# Altium PCB UnoShield.PcbDoc
Units mm, origin at the board's own origin, x right, y up, seen from the top; angles counter-clockwise.
Board outline 68.58 x 53.34 mm, 4 copper layers (Top Layer, Signal Layer 1, Signal Layer 2, Bottom Layer), stack 0.778 mm thick; 52 components, 29 nets, 160 pads, 29 vias.
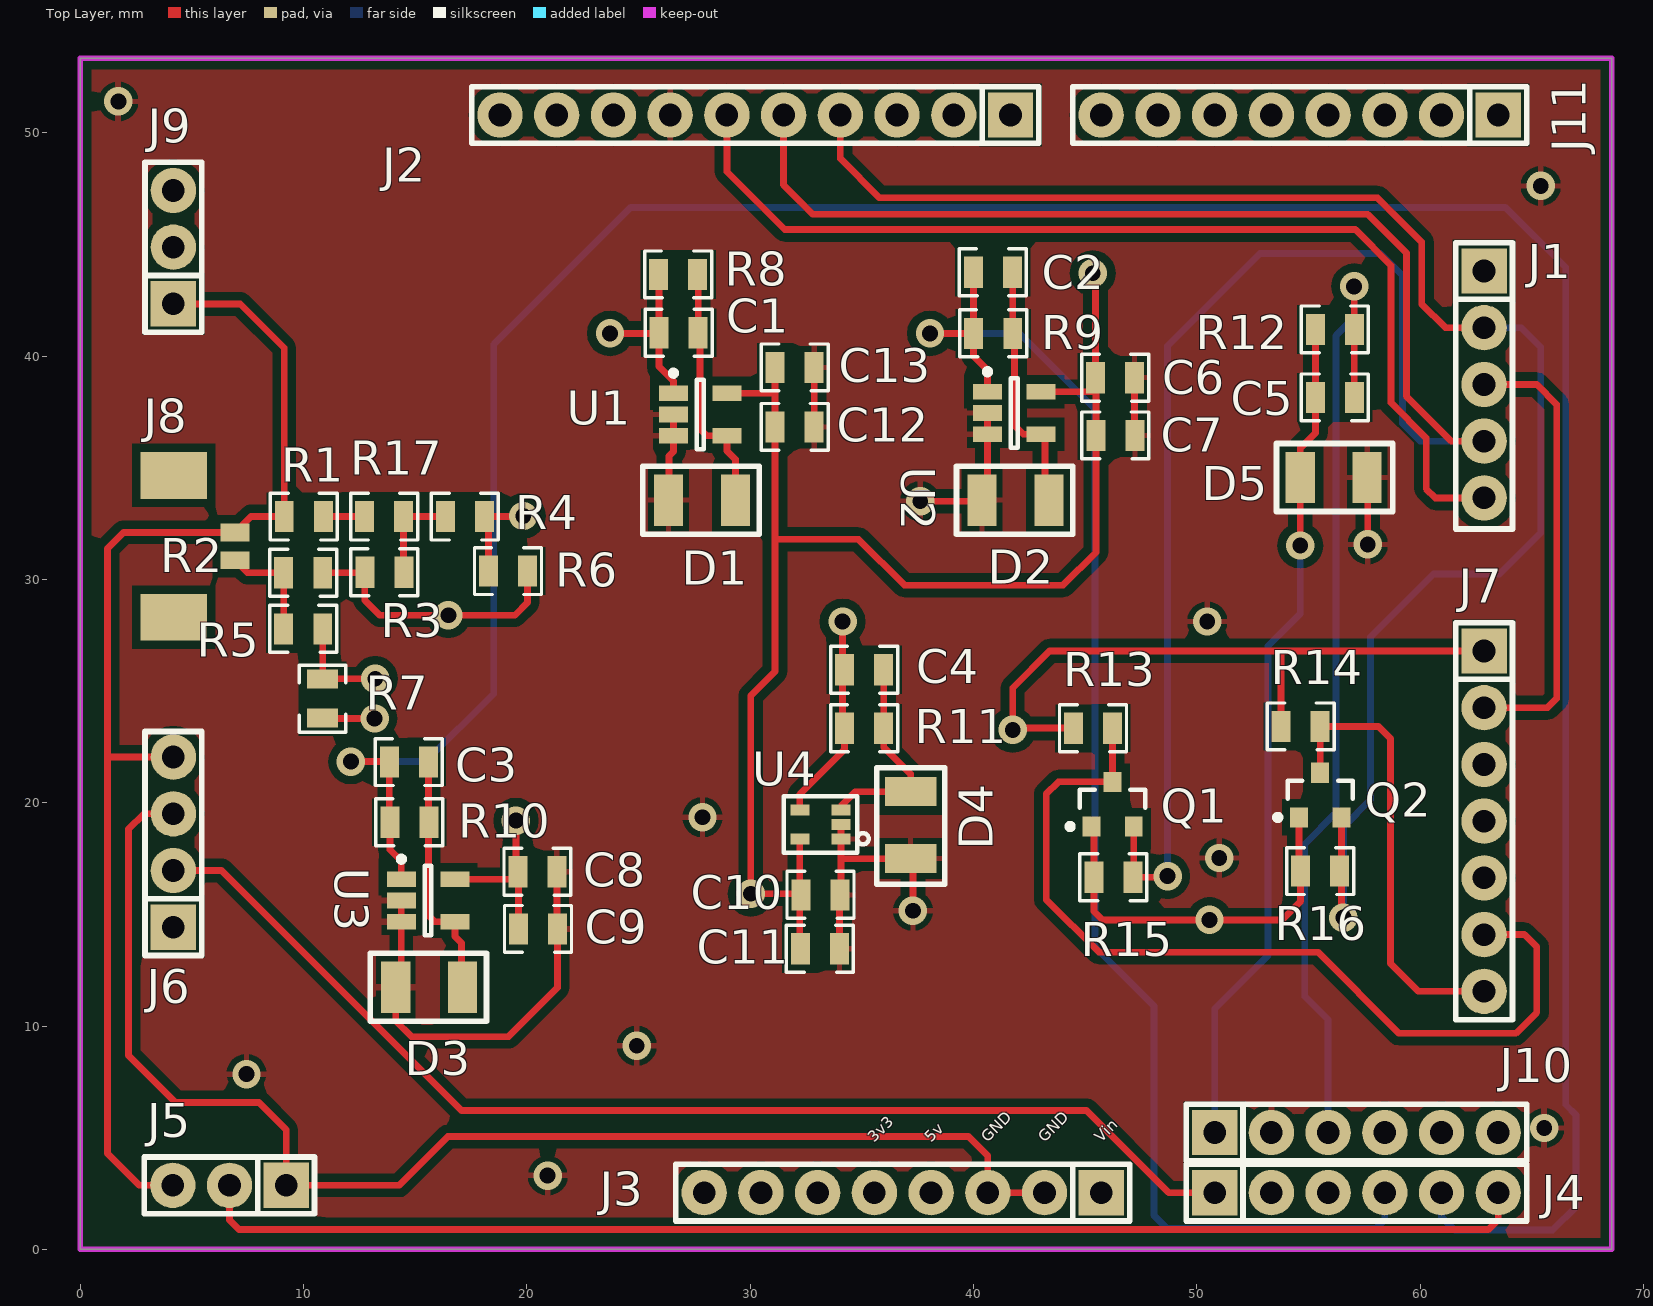
[diagram p0: Top Layer view]
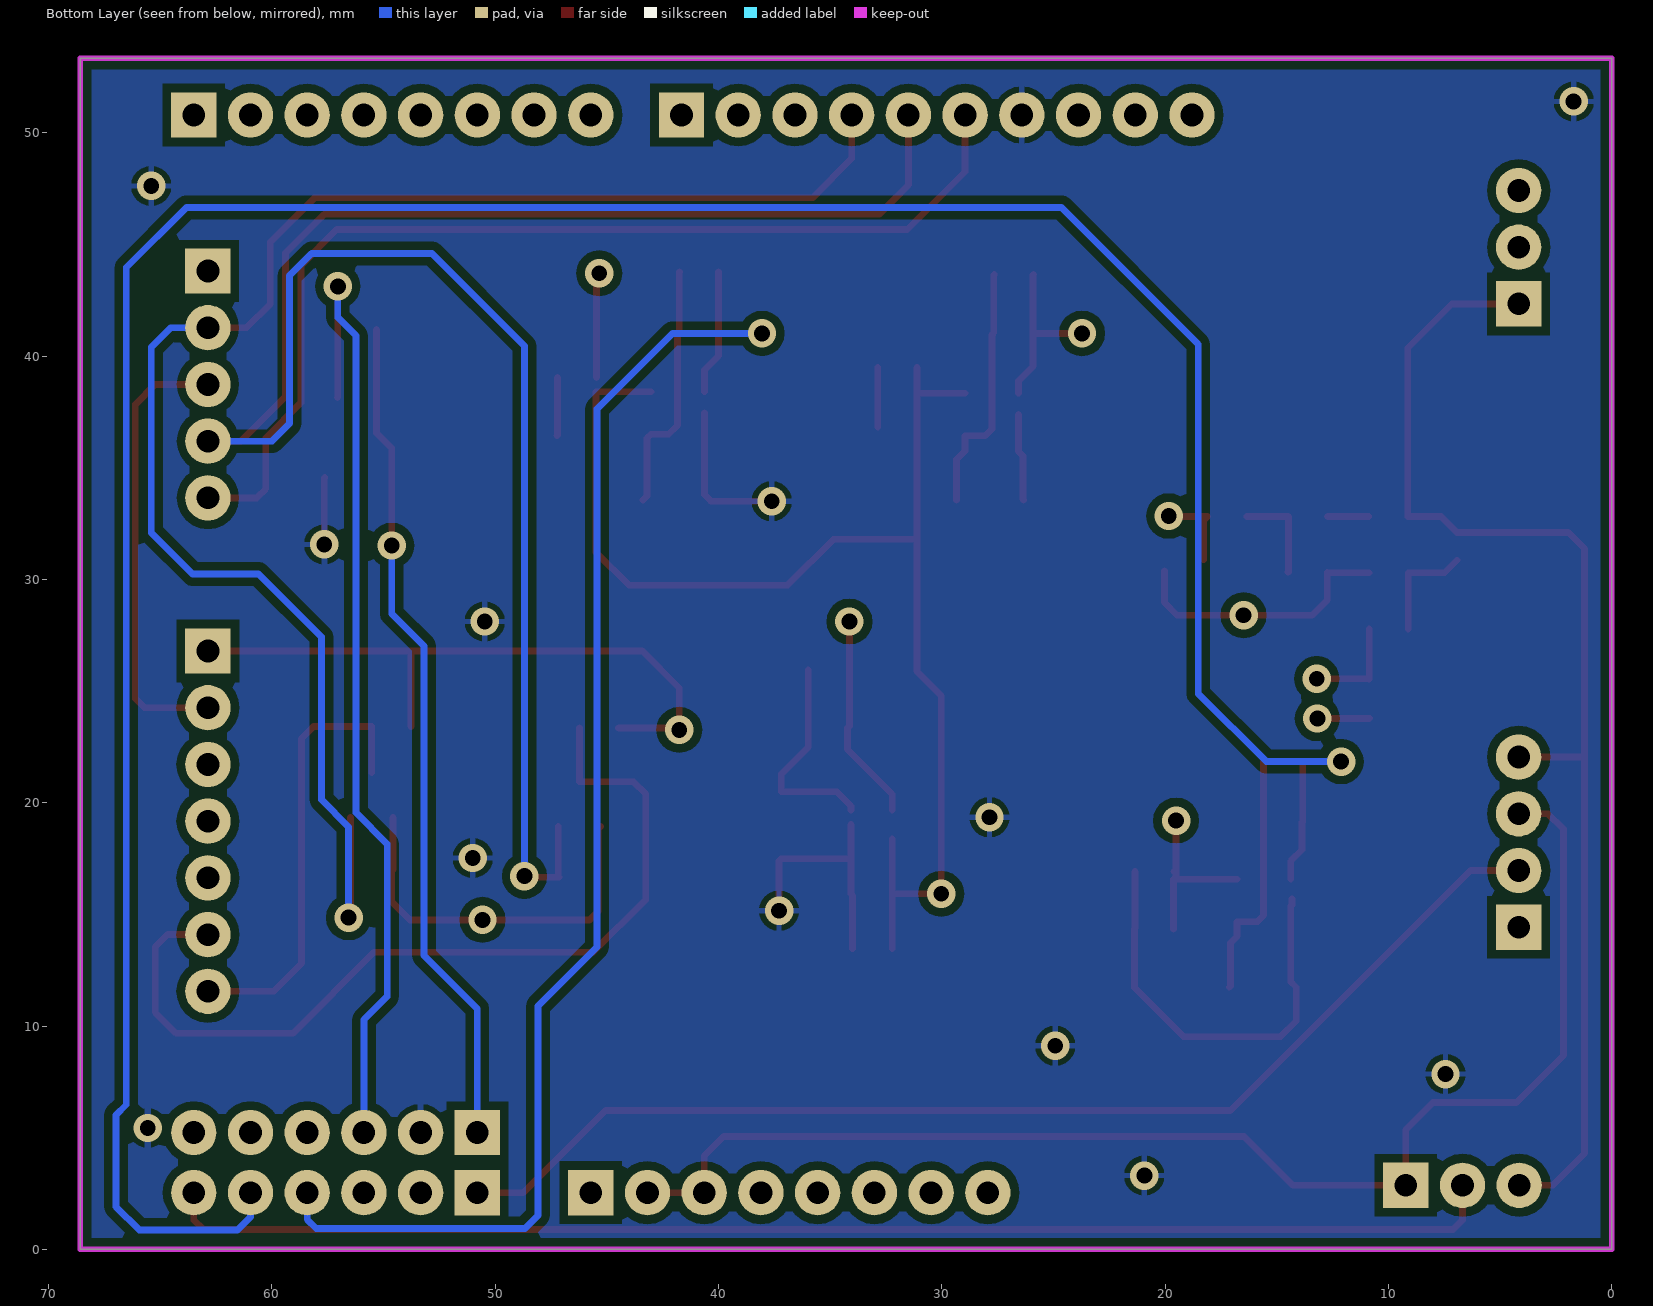
[diagram p1: Bottom Layer view, seen from below]
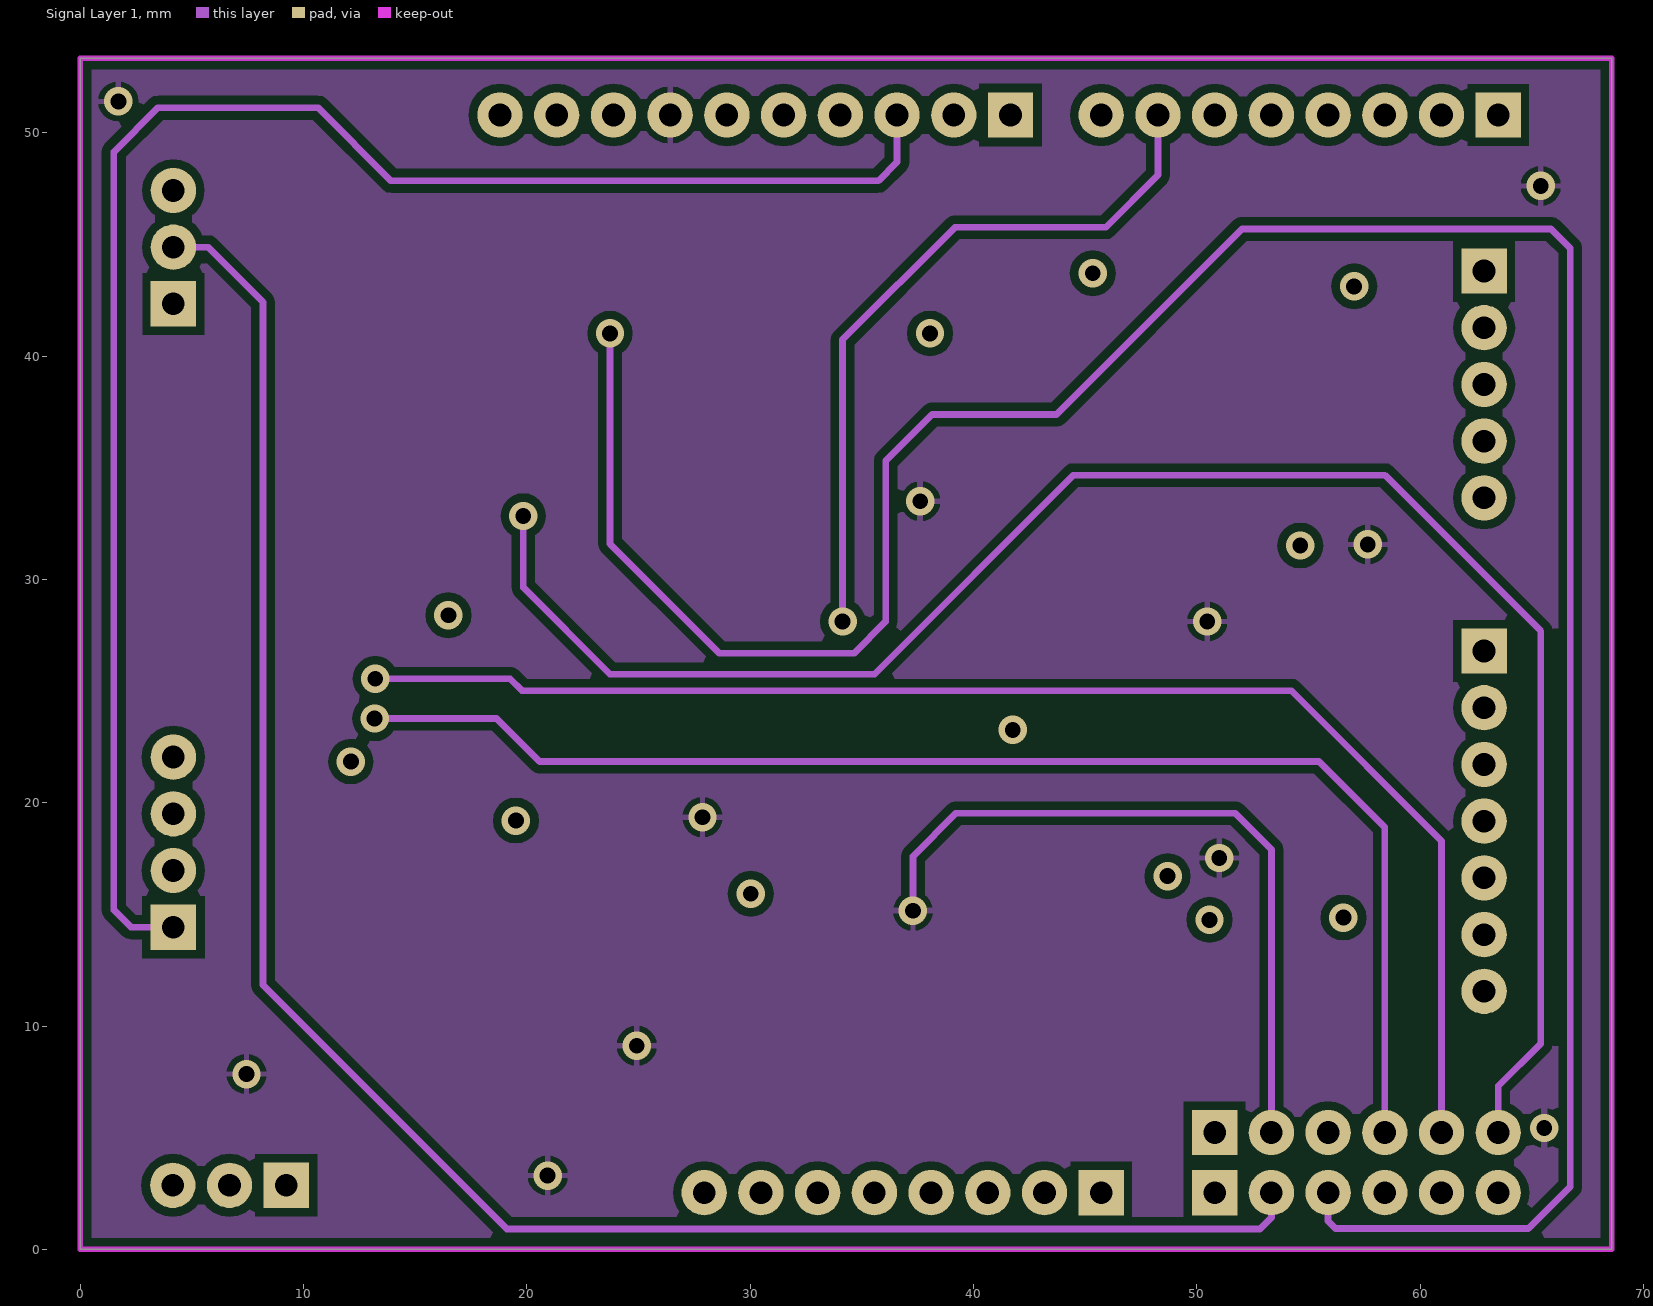
[diagram p2: Signal Layer 1]
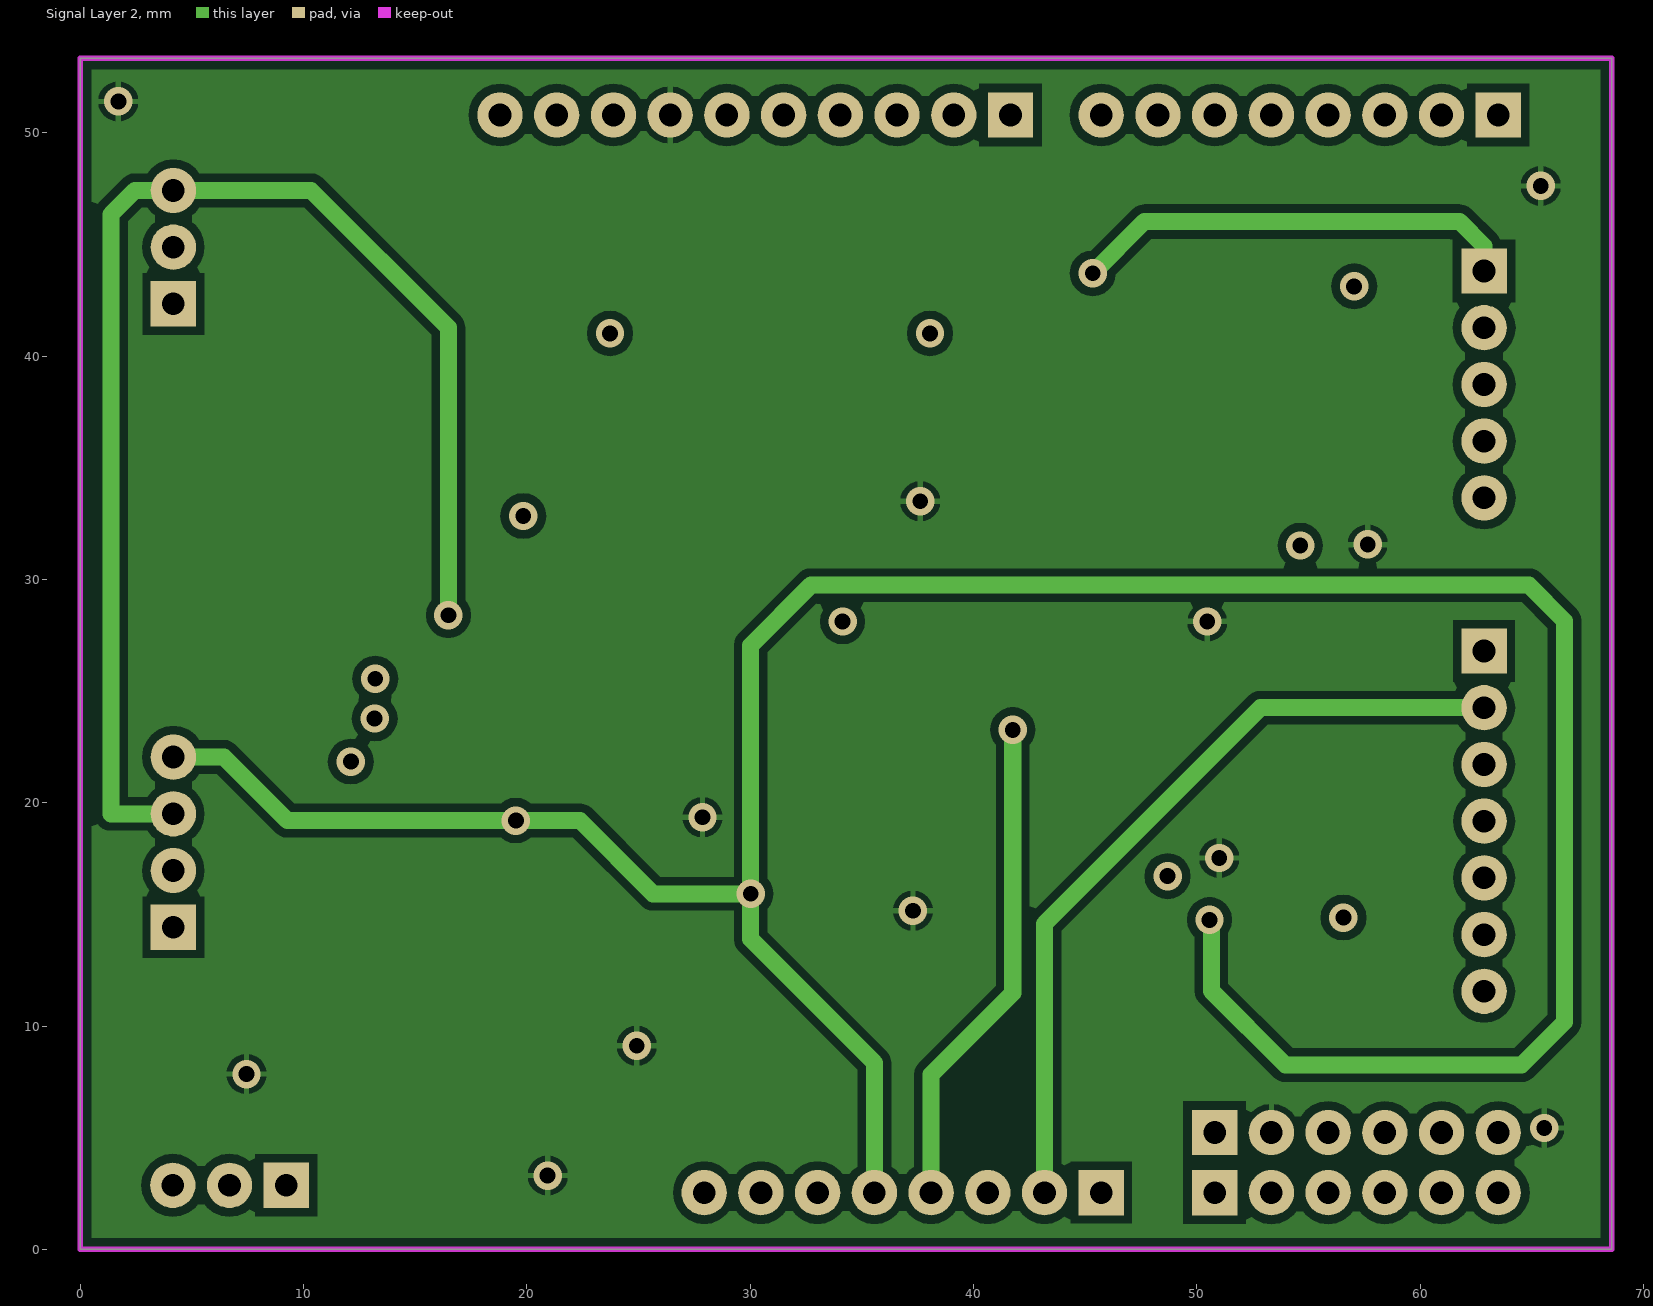
[diagram p3: Signal Layer 2]
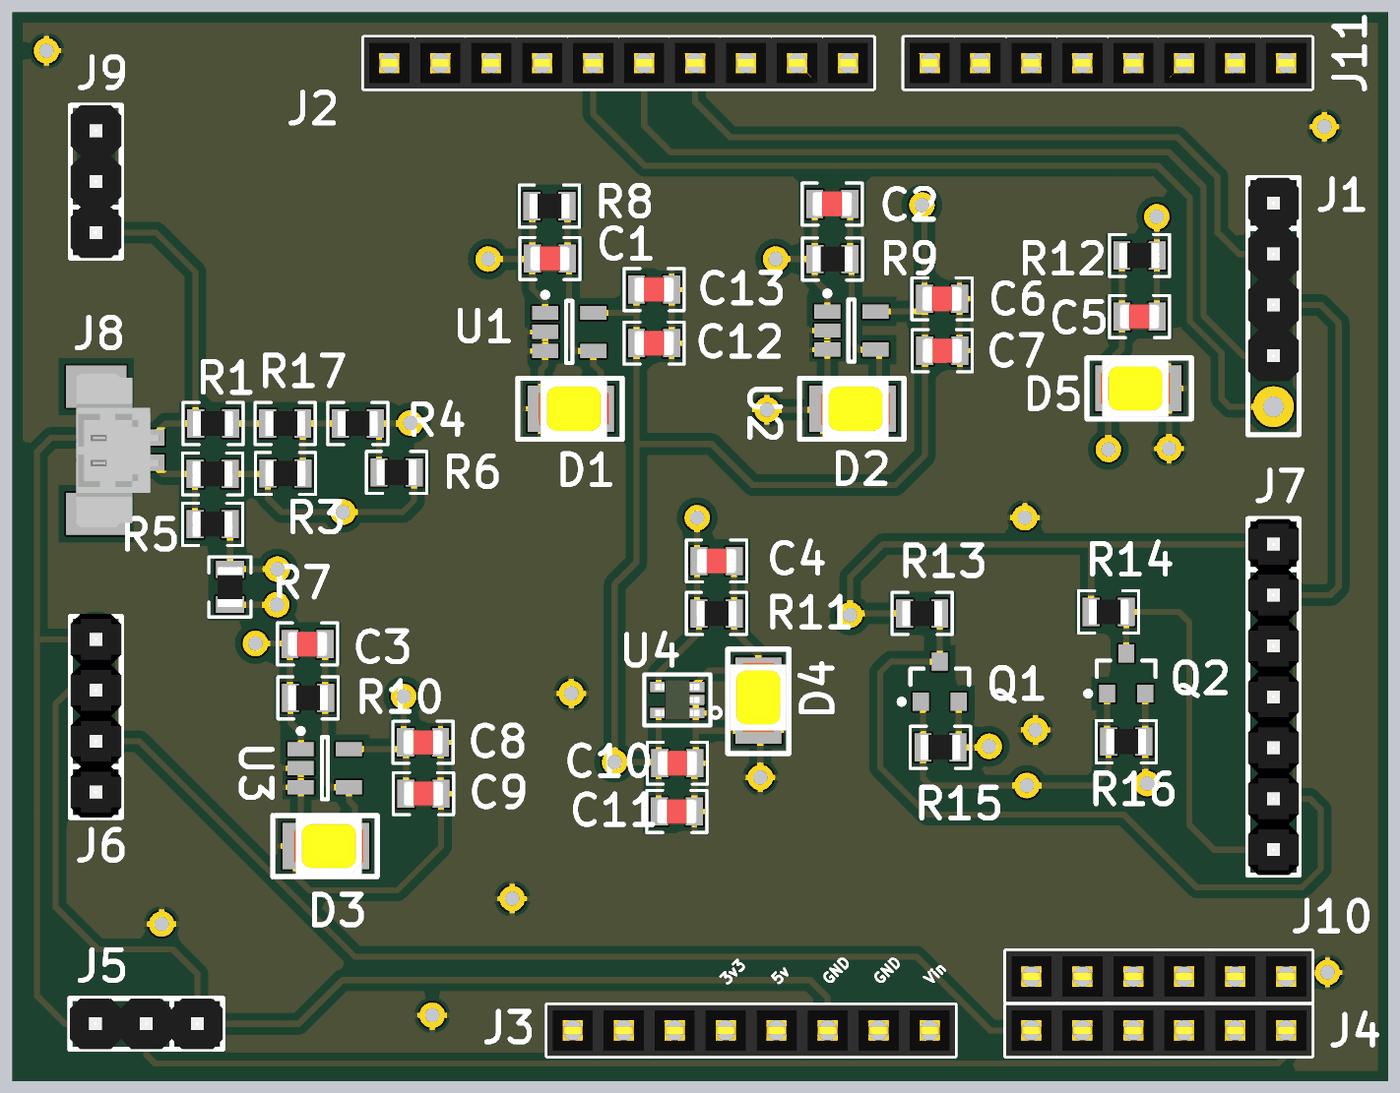
[diagram p4: 3D render of the assembled board from above, using the file's embedded part models]

## Layer stack, top to bottom
Top Solder: solder mask 0.0102, Solder Resist, Dk 3.5
Top Layer: signal copper 0.0356
Dielectric1: core 0.254, FR-4, Dk 4.2
Signal Layer 1: signal copper 0.036
Dielectric 3: prepreg 0.127, Dk 4.2
Signal Layer 2: signal copper 0.036
Dielectric 2: core 0.254, Dk 4.2
Bottom Layer: signal copper 0.0356
Bottom Solder: solder mask 0.0102, Solder Resist, Dk 3.5

## Board outline
0,0 0,53.34 68.58,53.34 68.58,38.1 68.58,0

## Design rules (kind name [scope] priority, off if disabled: settings)
Clearance [All] p1: gap=0.381 ignorepadtopadclearanceinfootprint=FALSE except(0.152: Arc-THPad Track-THPad)
ComponentClearance [All] p1: gap=0.127 collisioncheckmode=3 verticalgap=0.127 showdistances=FALSE
HoleSize [All] p1: absolutevalues=TRUE maxlimit=3.302 minlimit=0.025 maxpercent=80.000 minpercent=20.000
PolygonConnect [All] p1: connectstyle=Relief reliefconductorwidth=0.254 reliefentries=4 polygonreliefangle="90 Angle" airgapwidth=0.254
RoutingVias [All] p1: holewidth=0.381 width=0.762 viastyle="Through Hole" minholewidth=0.381 minwidth=0.762 maxholewidth=0.711 maxwidth=1.27
SilkToSolderMaskClearance SilkscreenOverComponentPads [IsPad] p1: minsilkscreentomaskgap=0.254 clearancetoexposedcopper=TRUE
SolderMaskExpansion [All] p1: expansion=0.102
Width [All] p1: maxlimit=1.27 minlimit=0.203 preferedwidth=0.305
27 further rules are at their usual default settings.

## Components (designator, comment, footprint, x,y, rotation, side; value= is the part's Value field where it differs from the comment)
C1 "10pF" CAP-0805(2012)-R 26.797,41.046 r180 top
C2 "10pF" CAP-0805(2012)-R 40.869,43.764 r180 top
C3 "10pF" CAP-0805(2012)-R 14.713,21.822 r180 top
C4 "10pF" CAP-0805(2012)-R 35.103,25.959 r180 top
C5 "Capacitance" CAP-0805(2012)-R 56.185,38.151 r0 top
C6 "100nF" CAP-0805(2012)-R 46.341,39.04 r0 top
C7 "1uF" CAP-0805(2012)-R 46.355,36.449 r0 top
C8 "100nF" CAP-0805(2012)-R 20.472,16.916 r0 top
C9 "1uF" CAP-0805(2012)-R 20.498,14.351 r0 top
C10 "100nF" CAP-0805(2012)-R 33.147,15.875 r0 top
C11 "1uF" CAP-0805(2012)-R 33.122,13.462 r0 top
C12 "100nF" CAP-0805(2012)-R 31.99,36.83 r0 top
C13 "1uF" CAP-0805(2012)-R 31.99,39.497 r0 top
D1 "GUVA-S12SD" "SMD 3528" 26.337,33.553 r270 top
D2 "GUVB-S11SD" "SMD 3528" 40.383,33.553 r270 top
D3 "GUVV-S10SD" "SMD 3528" 14.126,11.738 r270 top
D4 "GUVV-S10SD" "SMD 3528" 37.186,17.498 r0 top
D5 "GUVA-S12SD" "SMD 3528" 57.633,34.569 r90 top
J1 "P1.X" "HEADER 8X1 8.5MM" 63.5,50.8 r180 top
J2 "P0.X" "HEADER 10X1 8.5MM" 41.656,50.8 r180 top
J3 "POWER_UNO" "HEADER 8X1 8.5MM" 45.72,2.54 r180 top
J4 "P3.X" "HEADER 6X1 8.5MM" 50.8,2.54 r0 top
J5 "GUVA-S12SD-B" "HEADER 3X1 8.5MM" 9.22,2.87 r180 top
J6 "ML8511" "HEADER 4X1 8.5MM" 4.166,14.427 r90 top
J7 "SI1145" "HEADER 7X1 8.5MM" 62.865,26.797 r270 top
J8 "Header 2 pin" WM7606CT-ND 6.934,32.111 r270 top
J9 "LMT70-B" "HEADER 3X1 8.5MM" 4.166,42.342 r90 top
J10 "P2.X" "HEADER 6X1 8.5MM" 50.8,5.232 r0 top
J11 "TMP116EVM" "HEADER 5X1 8.5MM" 62.865,43.815 r270 top
Q1 "BSS138LT3G" ONSC-SOT-23-3-318-08_V 46.228,19.939 r90 top
Q2 "BSS138LT3G" ONSC-SOT-23-3-318-08_V 55.524,20.345 r90 top
R1 "Resistance" R-0805(2012)-R 10.008,32.817 r0 top
R2 "Resistance" R-0805(2012)-R 9.982,30.302 r0 top
R3 "Resistance" R-0805(2012)-R 13.614,30.328 r180 top
R4 "Resistance" R-0805(2012)-R 17.221,32.817 r0 top
R5 "Resistance" R-0805(2012)-R 9.982,27.788 r0 top
R6 "Resistance" R-0805(2012)-R 19.152,30.378 r180 top
R7 "Resistance" R-0805(2012)-R 10.846,24.663 r270 top
R8 "Resistance" R-0805(2012)-R 26.772,43.663 r180 top
R9 "Resistance" R-0805(2012)-R 40.883,41.021 r180 top
R10 "Resistance" R-0805(2012)-R 14.738,19.13 r180 top
R11 "Resistance" R-0805(2012)-R 35.103,23.343 r180 top
R12 "Resistance" R-0805(2012)-R 56.185,41.199 r0 top
R13 "10K" R-0805(2012)-R 45.353,23.343 r0 top
R14 "10K" R-0805(2012)-R 54.649,23.419 r0 top
R15 "10K" R-0805(2012)-R 46.265,16.662 r0 top
R16 "10K" R-0805(2012)-R 55.524,16.942 r0 top
R17 "Resistance" R-0805(2012)-R 13.603,32.817 r0 top
U1 "AD8538" SOT23-5 27.762,37.389 r0 top
U2 "AD8615" SOT23-5 41.828,37.455 r0 top
U3 "OPA336" SOT23-5 15.576,15.624 r0 top
U4 "OA1MPA" SC70-5L 33.147,19.025 r180 top

## Footprints (in the part's own frame and the unit in brackets; to place one, negate y for a bottom-side part, rotate by r counter-clockwise, add the part's x,y. Pads: shape width x height; smd on the part's side, far side on the other; paste and mask are expansions set on the pad)
CAP-0805(2012)-R [mm] "Capacitor 0805(2012) Reflow"
  rect 0.85x1.4 smd: 1(-0.875,0) 2(0.875,0)
  silkscreen extent -1.5,-1.05 1.5,1.05, body extent -1,-0.63 1,0.63, height 0.78
"HEADER 3X1 8.5MM" [mil] "Stackable 3 pin header"
  rect 80x80 hole 40: 1(0,0)
  round 80 hole 40: 2(100,0) 3(200,0)
  silkscreen extent -50,-50 250,50, body extent -50,-50 250,50, height 350
"HEADER 4X1 8.5MM" [mil] "Stackable 4 pin header"
  rect 80x80 hole 40: 1(0,0)
  round 80 hole 40: 2(100,0) 3(200,0) 4(300,0)
  silkscreen extent -50,-50 345,50, body extent -50,-50 350,50, height 200
"HEADER 5X1 8.5MM" [mil] "Stackable 5 pin header"
  rect 80x80 hole 40: 1(0,0)
  round 80 hole 40: 2(100,0) 3(200,0) 4(300,0) 5(400,0)
  silkscreen extent -50,-50 455,50, body extent -50,-50 350,50, height 358
"HEADER 6X1 8.5MM" [mil] "Stackable 6 pin header"
  rect 80x80 hole 40: 1(0,0)
  round 80 hole 40: 2(100,0) 3(200,0) 4(300,0) 5(400,0) 6(500,0)
  silkscreen extent -50,-50 550,50, body extent -50,-50 550,50, height 335
"HEADER 7X1 8.5MM" [mil] "Stackable 7 pin header"
  rect 80x80 hole 40: 1(0,0)
  round 80 hole 40: 2(100,0) 3(200,0) 4(300,0) 5(400,0) 6(500,0) 7(600,0)
  silkscreen extent -50,-50 650,50, body extent -50,-50 650,50, height 200
"HEADER 8X1 8.5MM" [mil] "Stackable 8 pin header"
  rect 80x80 hole 40: 1(0,0)
  round 80 hole 40: 2(100,0) 3(200,0) 4(300,0) 5(400,0) 6(500,0) 7(600,0) 8(700,0)
  silkscreen extent -50,-50 750,50, body extent -50,-50 750,50, height 335
"HEADER 10X1 8.5MM" [mil] "Stackable 10 pin header"
  rect 80x80 hole 40: 1(0,0)
  round 80 hole 40: 2(100,0) 3(200,0) 4(300,0) 5(400,0) 6(500,0) 7(600,0) 8(700,0) 9(800,0) 10(900,0)
  silkscreen extent -50,-50 950,50, body extent -50,-50 950,50, height 335
ONSC-SOT-23-3-318-08_V [mm] "SOT23, 3-Leads, Body 2.92x1.3mm, Pitch 0.95mm"
  rect 0.9x0.8 smd: 1(-1,0.95) 2(-1,-0.95) 3(1,0)
  silkscreen extent -1.12,-1.46 0.65,2.02, body extent -0.65,-1.46 0.65,1.46, height 1.11
R-0805(2012)-R [mm] "Resistor 0805(2012) Reflow"
  rect 0.85x1.4 smd: 1(-0.875,0) 2(0.875,0)
  silkscreen extent -1.5,-1.05 1.5,1.05, body extent -1,-0.62 1,0.63, height 0.5
SC70-5L [mm] "SC70, 5-Leads, Body 2.20x2.7mm, Pitch 0.65mm"
  rect 0.85x0.5 smd: 1(-0.925,0.65) 2(-0.925,0) 3(-0.925,-0.65) 4(0.925,-0.65) 5(0.925,0.65)
  silkscreen extent -2.16,-1.27 1.65,1.27, body extent -1.1,-1 1.1,1, height 1
"SMD 3528" [mm]
  rect 2.3x1.3 smd: A(0,0) K(0,3)
  silkscreen extent -1.52,-1.14 1.52,4.06, body extent -1.4,-0.1 1.4,3.4, height 0.95
SOT23-5 [mm] "SOT23, 5-Leads, Body 2.9x1.7mm, Pitch 0.95mm, Lead Span 2.8mm, IPC Low Density"
  rect 1.3x0.7 smd: 1(-1.2,0.95) 2(-1.2,0) 3(-1.2,-0.95) 4(1.2,-0.95) 5(1.2,0.95)
  silkscreen extent -1.32,-1.55 0.15,1.97, body extent -0.9,-1.55 0.9,1.55, height 1.45
WM7606CT-ND [mm]
  rect 2.1x3 smd: 0(-2.55,-2.75) 0(3.8,-2.75)
  rect 0.8x1.3 smd: 1(0,0) 2(1.25,0)
  body extent -3.19,-3.76 4.46,0.44, height 4.72

## Part data
C1 C2 C3 C4: library part C-0805(2012), "___ OHM ___ mW 0805(2012) SMD", Case/Package=0805, Case Code (Metric)=2012, Dielectric=C0G, Dielectric Material=Ceramic, Manufacturer=Kemet, Manufacturer Part Number=C0805C100J5GAC-TU, Max Operating Temperature=125°C, Min Operating Temperature=-55°C, Package Quantity=1, Supplier Part Number 1=80-C0805C100J5G, Temperature Coefficient=30ppm/°C, Tolerance=5%, Voltage=50V, Capacitance=10pF, Case Code (Imperial)=0805, ComponentLink1Description=https://datasheet.ciiva.com/144/docfinderpartnumber-c0805c100j5gactu-144802.pdf, ComponentLink1URL=https://datasheet.ciiva.com/144/docfinderpartnumber-c0805c100j5gactu-144802.pdf, ComponentLink2Description=https://datasheet.ciiva.com/6177/kem-c1003-c0g-smd-6177333.pdf, ComponentLink2URL=https://datasheet.ciiva.com/6177/kem-c1003-c0g-smd-6177333.pdf, ComponentLink3Description=https://datasheet.ciiva.com/28668/1789732-28668730.pdf, ComponentLink3URL=https://datasheet.ciiva.com/28668/1789732-28668730.pdf, ComponentLink4Description=https://datasheet.ciiva.com/5423/kem-c1003-c0g-smd-356956-5423483.pdf, ComponentLink4URL=https://datasheet.ciiva.com/5423/kem-c1003-c0g-smd-356956-5423483.pdf, ComponentLink5Description=https://datasheet.ciiva.com/14609/70095383-14609227.pdf, ComponentLink5URL=https://datasheet.ciiva.com/14609/70095383-14609227.pdf, ComponentLink6Description=https://datasheet.ciiva.com/2988/kem-c1003-c0g-smd-2988556.pdf, ComponentLink6URL=https://datasheet.ciiva.com/2988/kem-c1003-c0g-smd-2988556.pdf, ComponentLink7Description=https://datasheet.ciiva.com/7842/1725430-7842140.pdf, ComponentLink7URL=https://datasheet.ciiva.com/7842/1725430-7842140.pdf, ComponentLink8Description=https://datasheet.ciiva.com/7842/1725430-7842141.pdf, ComponentLink8URL=https://datasheet.ciiva.com/7842/1725430-7842141.pdf, Contact Material=Tin, Contact Plating=Tin, Depth=1.25mm, Dissipation Factor=0.1%, Height=0.78mm, Lead Free="Lead Free", Lead Pitch=0.75mm, Length=2mm, Mount="Surface Mount", Number of Pins=2, Packaging="Tape and Reel", Pricing 1="1=0.1, 10=0.04, 50=0.04, 100=0.028, 1000=0.019, 10000=0.012 (USD)", Radiation Hardening=No, REACH SVHC="No SVHC", Stock 1=118205, Supplier 1=Mouser, Termination=SMD/SMT, Thickness=0.035inch, Voltage Rating=50V, Voltage Rating (DC)=50V, Width=0.049inch
C5: library part C-0805(2012), "___ OHM ___ mW 0805(2012) SMD"
C6 C8 C10 C12: library part C-0805(2012), "___ OHM ___ mW 0805(2012) SMD", Case/Package=0805, Case Code (Metric)=2012, Dielectric=X7R, Insulation Resistance=100GR, Manufacturer=Yageo, Manufacturer Part Number=CC0805KRX7R9BB104, Max Operating Temperature=125°C, Min Operating Temperature=-55°C, Package Quantity=1, Supplier Part Number 1=603-CC805KRX7R9BB104, Tolerance=10%, Voltage=50V, Capacitance=100nF, Case Code (Imperial)=0805, ComponentLink1Description=https://datasheet.ciiva.com/11464/upy-gphc-x7r-6-3v-to-50v-8-11464757.pdf, ComponentLink1URL=https://datasheet.ciiva.com/11464/upy-gphc-x7r-6-3v-to-50v-8-11464757.pdf, ComponentLink2Description=https://datasheet.ciiva.com/28450/1489800-28450805.pdf, ComponentLink2URL=https://datasheet.ciiva.com/28450/1489800-28450805.pdf, ComponentLink3Description=https://datasheet.ciiva.com/155/mlccorderingcode-155929.pdf, ComponentLink3URL=https://datasheet.ciiva.com/155/mlccorderingcode-155929.pdf, ComponentLink4Description=https://datasheet.ciiva.com/11786/0900766b80d84f1d-11786009.pdf, ComponentLink4URL=https://datasheet.ciiva.com/11786/0900766b80d84f1d-11786009.pdf, ComponentLink5Description=https://datasheet.ciiva.com/155/mlccorderingcode-155930.pdf, ComponentLink5URL=https://datasheet.ciiva.com/155/mlccorderingcode-155930.pdf, ComponentLink6Description=https://datasheet.ciiva.com/155/mlccorderingcode-155931.pdf, ComponentLink6URL=https://datasheet.ciiva.com/155/mlccorderingcode-155931.pdf, ComponentLink7Description=https://datasheet.ciiva.com/46393/1734573-46393307.pdf, ComponentLink7URL=https://datasheet.ciiva.com/46393/1734573-46393307.pdf, ComponentLink8Description=https://datasheet.ciiva.com/16625/upy-gphc-x7r-6-3v-to-50v-8-16625549.pdf, ComponentLink8URL=https://datasheet.ciiva.com/16625/upy-gphc-x7r-6-3v-to-50v-8-16625549.pdf, ComponentLink9Description=https://datasheet.ciiva.com/29242/445210-da-01-en-kerko-chip-0805-x7r-0-1uf-10proz-50vg-29242074.pdf, ComponentLink9URL=https://datasheet.ciiva.com/29242/445210-da-01-en-kerko-chip-0805-x7r-0-1uf-10proz-50vg-29242074.pdf, Depth=1.25mm, Halogen Free="Halogen Free", Height=0.85mm, Lead Free="Lead Free", Length=2mm, Material=Ceramic, Mount="Surface Mount", Number of Pins=2, Packaging="Tape and Reel", Pricing 1="1=0.1, 10=0.037, 50=0.037, 100=0.017, 1000=0.013, 10000=0.009 (USD)", Radiation Hardening=No, REACH SVHC="No SVHC", Stock 1=432978, Supplier 1=Mouser, Termination=SMD/SMT, Thickness=0.033inch, Voltage Rating=50V, Width=0.049inch
C7 C9 C11 C13: library part C-0805(2012), "___ OHM ___ mW 0805(2012) SMD", Case/Package=0805, Case Code (Metric)=2012, Dielectric=X7R, Manufacturer=Yageo, Manufacturer Part Number=CC0805KKX7R7BB105, Max Operating Temperature=125°C, Min Operating Temperature=-55°C, Package Quantity=1, Supplier Part Number 1=603-CC805KKX7R7BB105, Tolerance=10%, Voltage Rating=16V, Capacitance=1uF, Case Code (Imperial)=0805, ComponentLink1Description=https://datasheet.ciiva.com/144/mlccorderingcode-144902.pdf, ComponentLink1URL=https://datasheet.ciiva.com/144/mlccorderingcode-144902.pdf, ComponentLink2Description=https://datasheet.ciiva.com/13173/upy-gp-np0-16v-to-50v-8-3714-13173254.pdf, ComponentLink2URL=https://datasheet.ciiva.com/13173/upy-gp-np0-16v-to-50v-8-3714-13173254.pdf, ComponentLink3Description=https://datasheet.ciiva.com/15189/getdatasheetpartid-251802-15189206.pdf, ComponentLink3URL=https://datasheet.ciiva.com/15189/getdatasheetpartid-251802-15189206.pdf, ComponentLink4Description=https://datasheet.ciiva.com/144/mlccorderingcode-144903.pdf, ComponentLink4URL=https://datasheet.ciiva.com/144/mlccorderingcode-144903.pdf, ComponentLink5Description=https://datasheet.ciiva.com/144/mlccorderingcode-144904.pdf, ComponentLink5URL=https://datasheet.ciiva.com/144/mlccorderingcode-144904.pdf, ComponentLink6Description=https://datasheet.ciiva.com/7978/1489800-7978201.pdf, ComponentLink6URL=https://datasheet.ciiva.com/7978/1489800-7978201.pdf, ComponentLink7Description=https://datasheet.ciiva.com/11464/upy-gphc-x7r-6-3v-to-50v-8-11464750.pdf, ComponentLink7URL=https://datasheet.ciiva.com/11464/upy-gphc-x7r-6-3v-to-50v-8-11464750.pdf, ComponentLink8Description=https://datasheet.ciiva.com/28450/1489800-28450750.pdf, ComponentLink8URL=https://datasheet.ciiva.com/28450/1489800-28450750.pdf, Depth=1.25mm, Halogen Free="Halogen Free", Lead Free="Lead Free", Length=2mm, Packaging="Tape and Reel", Pricing 1="1=0.1, 10=0.049, 50=0.049, 100=0.022, 1000=0.017, 10000=0.011 (USD)", Radiation Hardening=No, REACH SVHC="No SVHC", Stock 1=127286, Supplier 1=Mouser, Termination=SMD/SMT, Thickness=0.049inch, Voltage Rating (DC)=16V, Width=0.049inch
D1 D2 D3 D4 D5: "UV Photodiode, 3528 SMD"
J1: library part IOL
J2: library part IOH
J4: library part AD
J5 J6: "UV Light Sensor Breakout Board"
J7: "UV Light Sensor Digital"
J8: library part CON-2Pin, "Header, 2 pin, .1 pitch", Current Rating=-, Insulation Color=Natural, Manufacturer="Molex, LLC", Manufacturer Part Number=0533980271, Material Flammability Rating="UL94 V-0", Supplier Part Number 1=WM7606CT-ND, Applications="Automotive, General Purpose, Industrial, Medical", Category="Connectors, Interconnects", ComponentLink1Description=http://www.molex.com/pdm_docs/sd/533980271_sd.pdf, ComponentLink1URL=http://www.molex.com/pdm_docs/sd/533980271_sd.pdf, Connector Type=Header, Contact Finish - Mating=Tin, Contact Finish - Post=Tin, Contact Finish Thickness - Mating="39µin (1.00µm)", Contact Finish Thickness - Post=-, Contact Length - Mating=-, Contact Length - Post=-, Contact Material="Phosphor Bronze", Contact Shape=Rectangular, Contact Type="Male Blade", Fastening Type="Detent Lock", Features="Solder Retention", Ingress Protection=-, Insulation Height="0.185\" (4.70mm)", Insulation Material="Polyamide (PA), Nylon", Mated Stacking Heights=-, Mounting Type="Surface Mount", Number of Positions=2, Number of Positions Loaded=All, Number of Rows=1, Operating Temperature=-, Overall Contact Length=-, Packaging="Cut Tape (CT)", Part Status=Active, Pitch - Mating="0.049\" (1.25mm)", Pricing 1="1=1.07, 10=0.941, 25=0.886, 50=0.849, 100=0.8122, 250=0.73832, 500=0.66448 (USD)", RoHS="RoHS Compliant", Row Spacing - Mating=-, Shrouding="Shrouded - 3 Wall", Stock 1=38010, Style="Board to Cable/Wire", Supplier 1=Digi-Key, Termination=Solder, Voltage Rating=-
J9: "Precision Analog Temperature Sensor"
Q1 Q2: library part CMP-1058-00765-1, "Power MOSFET, 200 mA, 50 V, N-Channel, 3-Pin SOT-23, Pb-Free, Tape and Reel", Manufacturer="On Semiconductor", Package Type=SOT-23-3, Channel Polarity="N Channel", Ciss Typ (pF)=40, ComponentLink1Description="Manufacturer URL", ComponentLink1URL=http://www.onsemi.com/, ComponentLink2Description=Datasheet, ComponentLink2URL=http://www.onsemi.com/pub_link/Collateral/BSS138LT1-D.PDF, ComponentLink3Description="Package Specification", ComponentLink3URL=http://www.onsemi.cn/pub_link/Collateral/318-08.PDF, Configuration=Single, Coss Typ (pF)=12, Crss Typ (pF)=3.5, DatasheetVersion="Rev. 8", ID Max (A)=0.2, Mounting Technology="Surface Mount", PackageDescription="3-Pin Small Outline Transistor, Body 2.92 x 1.3 mm, Pitch 0.95 mm", PackageReference=SOT-23-3-318-08, PackageVersion="Rev. AP, 11/2009", Packing="Tape and Reel", PartNumber=BSS138LT3G, PD Max (W)=0.225, RoHS=Pb-Free, V(BR)DSS Min (V)=50, VGS(th) Max (V)=1.5, VGS Max (V)=20
R1 R2 R3 R4 R5 R6 R7 R8 R9 R10 R11 R12 R17: library part R-0805(2012), "___ OHM ___ mW 0805(2012) SMD"
R13 R14 R15 R16: library part R-0805(2012), "___ OHM ___ mW 0805(2012) SMD", Case/Package=0805, Case Code (Metric)=2012, Manufacturer=Yageo, Manufacturer Part Number=RC0805FR-0710KL, Max Operating Temperature=155°C, Max Power Dissipation=125mW, Min Operating Temperature=-55°C, Package Quantity=1, Supplier Part Number 1=603-RC0805FR-0710KL, Temperature Coefficient=100ppm/°C, Tolerance=1%, Voltage Rating=150V, Case Code (Imperial)=0805, ComponentLink1Description=https://datasheet.ciiva.com/11808/0900766b8106beab-11808151.pdf, ComponentLink1URL=https://datasheet.ciiva.com/11808/0900766b8106beab-11808151.pdf, ComponentLink2Description=https://datasheet.ciiva.com/12669/rc0805-12669688.pdf, ComponentLink2URL=https://datasheet.ciiva.com/12669/rc0805-12669688.pdf, ComponentLink3Description=https://datasheet.ciiva.com/46447/444164-46447563.pdf, ComponentLink3URL=https://datasheet.ciiva.com/46447/444164-46447563.pdf, ComponentLink4Description=https://datasheet.ciiva.com/2456/pyu-r-int-thick-7-2456972.pdf, ComponentLink4URL=https://datasheet.ciiva.com/2456/pyu-r-int-thick-7-2456972.pdf, ComponentLink5Description=https://datasheet.ciiva.com/2456/pyu-r-int-thick-7-2456973.pdf, ComponentLink5URL=https://datasheet.ciiva.com/2456/pyu-r-int-thick-7-2456973.pdf, ComponentLink6Description=https://datasheet.ciiva.com/2456/pyu-r-int-thick-7-2456974.pdf, ComponentLink6URL=https://datasheet.ciiva.com/2456/pyu-r-int-thick-7-2456974.pdf, ComponentLink7Description=https://datasheet.ciiva.com/16747/rc0805-16747087.pdf, ComponentLink7URL=https://datasheet.ciiva.com/16747/rc0805-16747087.pdf, Composition="Thick Film", Depth=1.25mm, Height=0.024inch, Lead Free="Lead Free", Length=2mm, Military Standard=Not, Number of Terminations=2, Packaging="Tape and Reel", Power Rating=125mW, Pricing 1="1=0.1, 10=0.016, 50=0.016, 100=0.006, 1000=0.004, 10000=0.003 (USD)", REACH SVHC=Unknown, Resistance=10K, Stock 1=1821555, Supplier 1=Mouser, Termination=SMD/SMT, Width=0.049inch
U1: "IC SMD Atuo-Zero Op Amp Precision, Low Power", en - Input Voltage Noise Density="50 nV/sqrt Hz at 5 V", Ib - Input Bias Current="25 pA", Manufacturer="Analog Devices", Manufacturer Part Number=AD8538AUJZ-REEL7, Maximum Dual Supply Voltage="+/- 2.5 V", Maximum Operating Temperature="+ 125 C", Minimum Dual Supply Voltage="+/- 1.35 V", Minimum Operating Temperature="- 40 C", Operating Supply Current="180 uA", Operating Supply Voltage="2.7 V to 5.5 V", Package / Case=TSOT-5, PSRR - Power Supply Rejection Ratio="125 dB", Supplier Part Number 1=584-AD8538AUJZ-R7, Supply Voltage - Max="5.5 V", Supply Voltage - Min="2.7 V", Voltage Gain dB="141 dB", Vos - Input Offset Voltage="5 uV", Brand="Analog Devices", Category="Precision Amplifiers", CMRR - Common Mode Rejection Ratio="150 dB", ComponentLink1Description=http://www.mouser.com/ds/2/609/AD8538_8539-877837.pdf, ComponentLink1URL=http://www.mouser.com/ds/2/609/AD8538_8539-877837.pdf, GBP - Gain Bandwidth Product="430 kHz", Height="0.87 mm", Length="2.9 mm", Minimum Order Quantity=1, Mounting Style=SMD/SMT, Number of Channels="1 Channel", Packaging=Reel, Pricing 1="1=1.39, 10=1.26, 25=1.12, 100=1.01, 250=0.900, 500=0.788, 1000=0.652, 3000=0.606, 6000=0.601 (USD)", Product="Precision Amplifiers", Reeling=True, RoHS="RoHS Compliant", RoHS - Mouser=Y, Series=AD8538, Shutdown="No Shutdown", SR - Slew Rate="0.4 V/us at 5 V", Standard Pack Qty=3000, Stock 1=8750, Supplier 1=Mouser, Type="General Purpose Amplifier", Width="1.6 mm"
U2: "IC SMD Transimpedance Op Amp Precision", en - Input Voltage Noise Density="10 nV/sqrt Hz at 5 V", Ib - Input Bias Current="550 pA", Input Voltage Range - Max="5 V", Manufacturer="Analog Devices", Manufacturer Part Number=AD8615AUJZ-REEL7, Maximum Operating Temperature="+ 125 C", Minimum Operating Temperature="- 40 C", Operating Supply Current="1.7 mA", Operating Supply Voltage="2.7 V to 5 V", Output Current per Channel="150 mA", Package / Case=TSOT-5, PSRR - Power Supply Rejection Ratio="90 dB", Supplier Part Number 1=584-AD8615AUJZ-R7, Supply Voltage - Min="2.7 V", Voltage Gain dB="123.52 dB", Vos - Input Offset Voltage="80 uV", Brand="Analog Devices", Category="Precision Amplifiers", CMRR - Common Mode Rejection Ratio="100 dB", ComponentLink1Description=http://www.mouser.com/ds/2/609/AD8615_8616_8618-877841.pdf, ComponentLink1URL=http://www.mouser.com/ds/2/609/AD8615_8616_8618-877841.pdf, GBP - Gain Bandwidth Product="24 MHz", Height="0.87 mm", Length="2.9 mm", Minimum Order Quantity=1, Mounting Style=SMD/SMT, Number of Channels="1 Channel", Output Type="Rail to Rail Input/Output", Packaging=Reel, Pricing 1="1=2.11, 10=1.91, 25=1.71, 100=1.53, 250=1.36, 500=1.19, 1000=0.992, 3000=0.921, 6000=0.913 (USD)", Product="Precision Amplifiers", Reeling=True, RoHS="RoHS Compliant", RoHS - Mouser=Y, Series=AD8615, Shutdown="No Shutdown", SR - Slew Rate="12 V/us", Standard Pack Qty=3000, Stock 1=7346, Supplier 1=Mouser, Supply Voltage - Max="5 V", Type="General Purpose Amplifier", Width="1.6 mm"
U3: en - Input Voltage Noise Density="40 nV/sqrt Hz", Ib - Input Bias Current="10 pA", In - Input Noise Current Density="30 fA/sqrt Hz", Manufacturer="Texas Instruments", Manufacturer Part Number=OPA336NA/3K, Maximum Operating Temperature="+ 85 C", Minimum Operating Temperature="- 40 C", Operating Supply Current="20 uA", Operating Supply Voltage="2.3 V to 5.5 V", Package / Case=SOT-23-5, PSRR - Power Supply Rejection Ratio="25 uV/V", Supplier Part Number 1=595-OPA336NA/3K, Supply Voltage - Max="5.5 V", Supply Voltage - Min="2.3 V", Voltage Gain dB="115 dB", Vos - Input Offset Voltage="0.125 mV", Amplifier Type="Low Power Amplifier", Brand="Texas Instruments", Category="Operational Amplifiers - Op Amps", CMRR - Common Mode Rejection Ratio="76 dB to 86 dB", GBP - Gain Bandwidth Product="100 kHz", Height="1.15 mm", Input Type=Rail-to-Rail, Ios - Input Offset Current="10 pA", Length="2.9 mm", Minimum Order Quantity=1, Mounting Style=SMD/SMT, Number of Channels="1 Channel", Output Type=Rail-to-Rail, Packaging=Reel, Pricing 1="1=1.72, 10=1.55, 25=1.47, 100=1.24, 250=1.17, 500=1.02, 1000=0.731, 3000=0.731 (USD)", Product="Precision Amplifiers", Reeling=True, RoHS="RoHS Compliant", RoHS - Mouser=Y, Series=OPA336, Shutdown="No Shutdown", SR - Slew Rate="0.03 V/us", Standard Pack Qty=3000, Stock 1=11756, Supplier 1=Mouser, Supply Type=Single, Technology=CMOS, Width="1.6 mm"
U4: Case/Package=SC, Input Bias Current=1pA, Input Offset Voltage (Vos)=200uV, Manufacturer=STMicroelectronics, Manufacturer Part Number=OA1MPA22C, Max Operating Temperature=125°C, Min Operating Temperature=-40°C, Operating Supply Current=10uA, Output Current per Channel=56mA, Package Quantity=3000, Supplier Part Number 1=511-OA1MPA22C, Supply Voltage=5.5V, Bandwidth=150KHz, ComponentLink1Description=https://datasheet.ciiva.com/29638/dm00109015-29638347.pdf, Gain Bandwidth Product=150KHz, Height=1mm, Lead Free="Lead Free", Length=2.2mm, Number of Amplifiers=1, Number of Circuits=1, Number of Pins=5, Packaging="Tape and Reel", Pricing 1="1=1.27, 10=1.08, 50=1.08, 100=0.832, 1000=0.58, 10000=0.494 (USD)", REACH SVHC="No SVHC", Slew Rate=0.06V/µs, Stock 1=242, Supplier 1=Mouser, Width=1.35mm

## Via types
v1: diameter 1.27, hole 0.711, Top Layer to Bottom Layer, 29 vias

## Nets (pads, with @x,y where several pads share a name; then routed paths per layer and width w, separated by ;. In a path a pad name is that pad's centre, name@x,y a point inside that pad or via, vN(x,y) a via of type N, cw(c..) or ccw(c..) an arc to the next point about the centre after c; other vN are vias at no path point)
3.3V: C6.1 C7.1 C8.1 C9.1 C10.1 C11.1 C12.1 C13.1 J3.5 J5.3 J6.4 J8.1 J9.1 J11.1 Q1.1 Q2.1 R1.1 R15.1 R16.1 U1.5 U2.5 U3.5 U4.5 | length 296.8
  Top Layer w0.305: J5.3 2.642,2.87 1.219,4.293 1.219,22.047 ; J6.4 1.219,22.047 ; J9.1 7.163,42.342 9.133,40.372 R1.1 7.64,32.817 J8.1 1.936,32.111 1.219,31.394 1.219,22.047 ; U3.5 C8.1@19.623,16.574 ; v1(19.507,19.202) C8.1@19.507,17.007 ; C8.1 C8.1@19.507,17.007 ; C9.1 C8.1@19.623,16.574 ; U1.5 31.054,38.339 ; C13.1 C12.1 31.115,31.801 ; C11.1@32.222,13.462 C10.1@32.222,15.875 ; U4.5 C10.1@32.222,15.875 ; U2.5 45.48,38.405 45.491,38.393 45.491,31.217 44.018,29.743 36.906,29.743 34.849,31.801 31.115,31.801 ; Q1.1 45.39,18.827 R15.1 45.39,15.138 45.771,14.757 v1(50.571,14.757) 53.825,14.757 54.649,15.582 R16.1 54.574,17.017 Q2.1 ; v1(45.339,43.713) 45.466,43.586 C6.1 ; C8.1@19.507,17.007 19.507,16.69 C8.1@19.623,16.574 ; 31.115,31.801 31.115,25.883 30.023,24.79 v1(30.023,15.926) 32.12,15.926 32.146,15.951 C10.1@32.222,15.875
  Signal Layer 2 w0.762: J6.4 6.426,22.047 9.271,19.202 v1(19.507,19.202) 22.377,19.202 25.654,15.926 v1(30.023,15.926) ; J3.5 35.56,8.357 30.023,13.894 v1(30.023,15.926) ; v1(45.339,43.713) 47.65,46.025 61.773,46.025 62.865,44.933 J11.1 ; v1(50.571,14.757) 50.648,14.681 50.648,11.582 53.975,8.255 64.541,8.255 66.472,10.185 66.472,28.143 64.872,29.743 32.715,29.743 30.023,27.051 v1(30.023,15.926)
5V: J3.4 J7.1 R13.1 R14.1 | length 52.1
  Top Layer w0.305: R13.1 41.834,23.343 v1(41.758,23.266) 41.758,25.146 43.409,26.797 53.797,26.797 ; R14.1 53.774,26.774 53.797,26.797 ; J7.1 53.797,26.797
  Signal Layer 2 w0.762: J3.4 38.1,7.823 41.758,11.481 v1(41.758,23.266)
A_GUVA: J4.6 J5.2 | length 59.9
  Top Layer w0.305: J5.2 6.68,1.321 7.112,0.889 63.068,0.889 63.5,1.321 J4.6
A_ML8511: J4.1 J6.2 | length 52.6
  Top Layer w0.305: J6.2 6.325,16.967 17.069,6.223 45.06,6.223 48.743,2.54 J4.1
A_TEMP: J4.2 J9.2 | length 86.6
  Signal Layer 1 w0.305: J9.2 5.715,44.882 8.179,42.418 8.179,11.836 19.101,0.914 52.832,0.914 53.34,1.422 J4.2
ALERT: J2.6 J11.5 | length 47.4
  Top Layer w0.305: J2.6 28.956,48.26 31.547,45.669 57.099,45.669 58.699,44.069 58.699,37.918 60.274,36.343 60.274,34.061 60.681,33.655 J11.5
EN_ML8511: J2.3 J6.1 | length 76.7
  Signal Layer 1 w0.305: J6.1 2.261,14.427 1.499,15.189 1.499,49.149 3.48,51.13 10.643,51.13 13.919,47.854 35.738,47.854 36.576,48.692 J2.3
GAIN: J10.4 R7.2 | length 63.3
  Top Layer w0.305: R7.2 10.86,23.774 v1(13.183,23.774)
  Signal Layer 1 w0.305: v1(13.183,23.774) 18.644,23.774 20.574,21.844 55.474,21.844 58.42,18.898 J10.4
GND_1: J3.2 J3.3 J5.1 J6.3 J7.2 J9.3 J11.3 R2.2 R3.2 R6.1 | length 189.2
  Top Layer w0.305: J6.3 2.845,19.507 2.159,18.821 2.159,8.687 4.267,6.579 8.001,6.579 9.22,5.359 J5.1 14.275,2.87 16.459,5.055 39.776,5.055 40.64,4.191 J3.3 J3.2 ; R2.2 12.714,30.302 R3.2 12.739,29.069 13.411,28.397 v1(16.485,28.397) 19.456,28.397 20.027,28.967 R6.1 ; J7.2 65.71,24.257 66.116,24.663 66.116,37.846 65.227,38.735 J11.3
  Signal Layer 2 w0.762: J6.3 1.372,19.507 1.372,46.355 2.438,47.422 J9.3 10.338,47.422 16.485,41.275 v1(16.485,28.397) ; J3.2 43.18,14.58 52.857,24.257 J7.2
NetR1_2: R1.2 R17.1 | length 1.8
  Top Layer w0.305: R1.2 R17.1
SCL_3.3V: J2.5 J11.4 Q1.2 R15.2 | length 93.9
  Top Layer w0.305: J2.5 31.496,47.676 32.817,46.355 57.658,46.355 59.385,44.628 59.385,38.202 61.392,36.195 J11.4 ; Q1.2 47.178,16.701 R15.2 48.641,16.662 v1(48.692,16.713)
  Bottom Layer w0.305: v1(48.692,16.713) 48.692,40.462 52.832,44.602 58.217,44.602 59.207,43.612 59.207,36.982 59.995,36.195 J11.4
SCL_5V: J7.6 Q1.3 R13.2 | length 40.7
  Top Layer w0.305: R13.2 Q1.3 43.799,20.939 43.256,20.396 43.256,15.672 45.618,13.31 55.423,13.31 59.055,9.677 64.287,9.677 65.227,10.617 65.227,13.538 64.668,14.097 J7.6
SDA_3.3V: J2.4 J11.2 Q2.2 R16.2 | length 73.9
  Top Layer w0.305: J2.4 34.036,48.844 35.789,47.092 58.09,47.092 60.071,45.11 60.071,42.342 61.138,41.275 J11.2 ; Q2.2 56.474,14.95 v1(56.566,14.859)
  Bottom Layer w0.305: v1(56.566,14.859) 56.566,18.918 57.785,20.138 57.785,27.432 60.604,30.251 63.551,30.251 65.405,32.106 65.405,40.386 64.516,41.275 J11.2
SDA_5V: J7.7 Q2.3 R14.2 | length 20.2
  Top Layer w0.305: Q2.3 R14.2 58.141,23.419 58.674,22.885 58.674,12.802 59.919,11.557 J7.7
SG1: R3.1 R4.1 R17.2 | length 4.4
  Top Layer w0.305: R3.1 14.478,30.339 R17.2 R4.1
SG1_A: J10.6 R4.2 R6.2 | length 84
  Top Layer w0.305: R6.2@18.277,30.886 18.277,32.636 R4.2 19.812,32.817 v1(19.837,32.842)
  Signal Layer 1 w0.305: v1(19.837,32.842) 19.837,29.642 23.724,25.756 35.56,25.756 44.475,34.671 58.42,34.671 65.405,27.686 65.405,9.22 63.5,7.315 J10.6
SG2: J8.2 R2.1 R5.1 | length 4.9
  Top Layer w0.305: J8.2 7.493,30.302 R2.1 R5.1
SG2_A: J10.5 R5.2 R7.1 | length 68.4
  Top Layer w0.305: R5.2 10.857,25.55 10.86,25.552 v1(13.208,25.552)
  Signal Layer 1 w0.305: v1(13.208,25.552) 19.253,25.552 19.787,25.019 54.229,25.019 60.96,18.288 J10.5
UVD_1: C1.1 D1.K R8.1 U1.4 | length 11.3
  Top Layer w0.305: R8.1 27.672,43.637 C1.1 27.746,40.973 27.746,36.745 28.052,36.439 U1.4 28.962,35.757 29.337,35.382 D1.K
UVD_1A: C1.2 J4.3 R8.2 U1.1 | length 129.8
  Top Layer w0.305: v1(23.724,41.021) 25.795,41.021 25.846,40.97 C1.2 ; R8.2 25.922,43.637 C1.2 ; U1.1 26.562,38.894 25.922,39.534 C1.2
  Signal Layer 1 w0.305: v1(23.724,41.021) 23.724,31.598 28.626,26.695 34.646,26.695 36.068,28.118 36.068,35.306 38.151,37.389 43.713,37.389 52.019,45.695 65.862,45.695 66.726,44.831 66.726,2.819 64.846,0.94 56.21,0.94 55.88,1.27 J4.3
UVD_2: C2.1 D2.K R9.1 U2.4 | length 11.4
  Top Layer w0.305: C2.1 41.758,43.75 R9.1 41.834,40.945 41.834,36.906 42.235,36.505 U2.4 43.205,36.327 43.205,33.731 D2.K
UVD_2A: C2.2 J4.4 R9.2 U2.1 | length 65.5
  Top Layer w0.305: v1(38.049,41.021) R9.2@39.994,41.021 ; C2.2 R9.2@39.994,41.021 ; R9.2 R9.2@39.994,41.021 ; U2.1 40.628,39.383 39.994,40.017 R9.2@39.994,41.021
  Bottom Layer w0.305: v1(38.049,41.021) 42.062,41.021 45.441,37.643 45.441,13.538 48.082,10.897 48.082,1.524 48.666,0.94 58.014,0.94 58.42,1.346 J4.4
UVD_3: C3.1 D3.K R10.1 U3.4 | length 11.3
  Top Layer w0.305: C3.1 15.588,14.953 15.866,14.674 U3.4 16.776,14.018 17.075,13.719 17.075,11.789 D3.K
UVD_3A: C3.2 J4.5 R10.2 U3.1 | length 132.2
  Top Layer w0.305: v1(12.116,21.844) 13.816,21.844 C3.2 13.838,19.155 R10.2 13.863,17.896 14.376,17.383 U3.1
  Bottom Layer w0.305: v1(12.116,21.844) 15.469,21.844 18.517,24.892 18.517,40.538 24.638,46.66 63.83,46.66 66.523,43.967 66.523,6.477 66.98,6.02 66.98,1.905 65.938,0.864 61.544,0.864 60.96,1.448 J4.5
UVD_4: C4.1 D4.K R11.1 U4.3 | length 9.5
  Top Layer w0.305: U4.3 34.072,19.848 34.722,20.498 D4.K 37.186,21.285 35.978,22.493 R11.1 C4.1
UVD_4A: C4.2 J1.7 R11.2 U4.4 | length 41.8
  Top Layer w0.305: U4.4 32.222,20.386 34.228,22.391 R11.2 34.138,23.433 v1(34.138,28.118)
  Signal Layer 1 w0.305: v1(34.138,28.118) 34.138,40.742 39.167,45.771 45.923,45.771 48.26,48.108 J1.7
UVD_5GAIN: C5.2 J10.3 R12.2 | length 44.2
  Top Layer w0.305: v1(57.048,43.129) 57.048,38.162 C5.2
  Bottom Layer w0.305: J10.3 55.88,10.287 54.839,11.328 54.839,18.161 56.236,19.558 56.236,40.919 57.048,41.732 v1(57.048,43.129)
UVD_5NEG: C5.1 D5.K J10.1 R12.1 | length 37.8
  Top Layer w0.305: v1(54.635,31.521) 54.635,35.89 55.31,36.565 C5.1 R12.1
  Bottom Layer w0.305: J10.1 50.8,10.77 53.188,13.157 53.188,27.026 54.635,28.473 v1(54.635,31.521)
UVD_5POS: C6.2 C7.2 C8.2 C9.2 C10.2 C11.2 C12.2 C13.2 D1.A D2.A D3.A D4.A D5.A J2.7 J10.2 U1.2 U1.3 U2.2 U2.3 U3.2 U3.3 U4.1 U4.2 | length 82
  Top Layer w0.305: U3.2@14.31,15.691 14.31,15.418 14.376,15.351 U3.3 14.376,11.989 D3.A 14.126,10.233 14.834,9.525 19.177,9.525 21.373,11.721 C9.2 21.347,14.376 C8.2 ; D1.A 26.365,33.582 26.365,35.535 26.562,35.732 U1.3 U1.2 ; C12.2 C13.2 ; C11.2 33.997,15.85 C10.2 34.072,15.925 34.072,17.501 ; U4.2 U4.1 34.072,17.501 ; v1(37.287,15.164) 37.287,17.396 D4.A 34.075,17.498 34.072,17.501 ; v1(37.617,33.503) 40.332,33.503 D2.A 40.628,33.798 U2.3 U2.2 ; C6.2 47.216,36.463 C7.2 ; D5.A 57.658,34.544 v1(57.658,31.572)
  Signal Layer 1 w0.305: v1(37.287,15.164) 37.287,17.602 39.218,19.533 51.714,19.533 53.34,17.907 J10.2
  other v1: 20.93,3.302 65.557,5.436 7.442,7.849 24.917,9.119 51.003,17.526 27.864,19.355 50.47,28.118 65.405,47.625 1.702,51.41
pads on no net: J1.1 J1.2 J1.3 J1.4 J1.5 J1.6 J1.8 J2.1 J2.2 J2.8 J2.9 J2.10 J3.1 J3.6 J3.7 J3.8 J7.3 J7.4 J7.5 J8.0

## Polygon pours and split planes (outlines as drawn)
UVD_5POS on Signal Layer 2 "Signal_Layer_2_GND" (solid, remove dead copper, pour order 0): 0.508,0.508 68.072,0.508 68.072,52.832 0.508,52.832
UVD_5POS on Signal Layer 1 "Signal_Layer_1_GND" (solid, remove dead copper, pour order 2): 0.498,0.498 68.062,0.498 68.062,52.822 0.498,52.822
UVD_5POS on Bottom Layer "Bottom_Layer_GND" (solid, remove dead copper, pour order 4): 0.498,0.498 68.062,0.498 68.062,52.822 0.498,52.822
UVD_5POS on Top Layer "Top_Layer_GND" (solid, remove dead copper, pour order 6): 0.498,0.498 68.062,0.498 68.062,52.822 0.498,52.822

## Keep-outs
Keep-Out Layer:
  lines w0.254: 0,0 0,53.34 68.58,53.34 68.58,38.075 68.58,0 66.04,0 0,0

## Silkscreen, mask and mechanical layers (free items; w line width, h text height)
Top Overlay:
  text "3v3" at 35.56,4.752 h0.51 r45
  text "5v" at 38.1,4.752 h0.51 r45
  text "GND" at 40.64,4.752 h0.51 r45
  text "GND" at 43.18,4.752 h0.51 r45
  text "Vin" at 45.72,4.752 h0.51 r45
  text "RESET" at 32.893,-63.881 h0.51 r45
  text "3v3" at 35.433,-63.881 h0.51 r45
  text "5v" at 37.973,-63.881 h0.51 r45
  text "GND" at 40.513,-63.881 h0.51 r45
  text "GND" at 43.053,-63.881 h0.51 r45
  text "Vin" at 45.593,-63.881 h0.51 r45
Mechanical 1:
  circle w0.127: c15.24,50.8 r1.6
Mechanical 3:
  lines w0.127: 0,0 66.04,0 68.58,0 68.58,38.1 68.58,53.34 0,53.34 0,0